# Altium PCB 电机驱动L298N带光耦.PcbDoc (part 2 of 2)
Units mm, origin at the board's own origin, x right, y up, seen from the top; angles counter-clockwise.
Board outline 152.4 x 101.6 mm, 2 copper layers (Top Layer, Bottom Layer); 36 components, 29 nets, 101 pads, 0 vias.
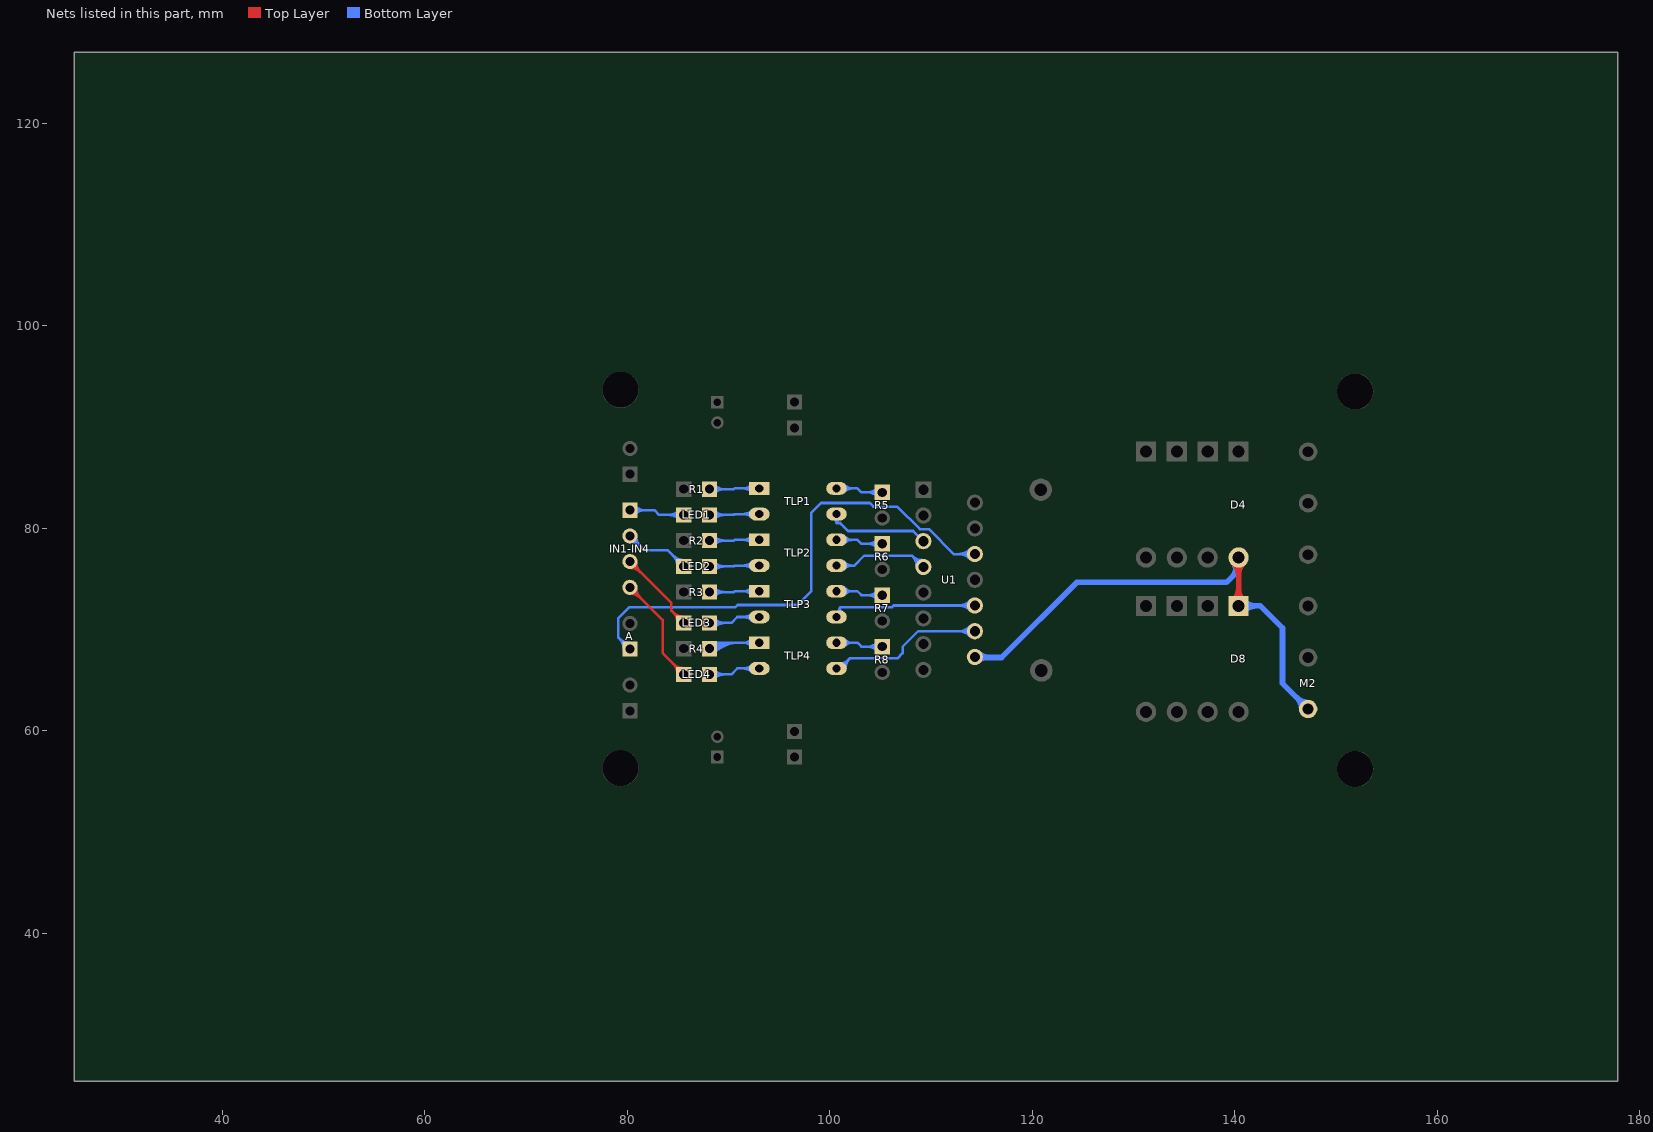
[diagram p2: the nets of this part, all layers, seen from the top]

## Nets (pads, with @x,y where several pads share a name; then routed paths per layer and width w, separated by ;. In a path a pad name is that pad's centre, name@x,y a point inside that pad or via, vN(x,y) a via of type N, cw(c..) or ccw(c..) an arc to the next point about the centre after c; other vN are vias at no path point) (continued)
NetD4_1: D4.1 D8.2 M2.2 U1.14 | length 67.2
  Top Layer w0.554: D8.2@139.852,72.844 ccw(c138.618,74.078) 140.363,74.078 ccw(c142.108,74.078) D8.2@140.874,72.844 ; D4.1@139.852,76.602 cw(c138.618,75.367) 140.363,75.367 cw(c142.108,75.367) D4.1@140.874,76.602 ; D8.2@140.363,72.333 D4.1@140.363,77.113
  Bottom Layer w0.554: U1.14@114.162,67.47 114.39,67.241 116.959,67.241 124.38,74.662 139.164,74.662 140.363,75.861 ; U1.14@114.691,66.924 cw(c115.458,66.157) 115.458,67.241 ; U1.14@114.691,67.663 ccw(c115.709,68.682) 115.709,67.241 ; 139.789,75.288 ccw(c139.1,75.978) D4.1@139.825,76.63 ; D4.1@140.002,76.487 cw(c139.641,75.861) 140.363,75.861 ; 140.203,75.701 ccw(c139.535,76.369) D4.1@140.237,77 ; D8.2@140.363,72.333 142.52,72.333 144.7,70.153 144.7,64.685 M2.2@147.23,62.155 ; D4.1@140.363,77.113 140.363,75.861 ; D4.1@140.724,76.487 ccw(c141.085,75.861) 140.363,75.861 ; D8.2@140.874,71.822 cw(c142.108,70.587) 142.108,72.333 cw(c142.108,74.078) D8.2@140.874,72.844 ; M2.2@146.595,62.155 ccw(c145.062,62.155) 146.146,63.239 ccw(c147.23,64.324) M2.2@147.23,62.79
NetIN1-IN4_1: IN1-IN4.1 LED1.2 | length 35.6
  Bottom Layer w0.254: IN1-IN4.1@80.264,81.788 82.677,81.788 83.145,81.32 LED1.2@85.583,81.32 ; IN1-IN4.1@80.525,81.527 cw(c81.155,80.897) 81.155,81.788 ; IN1-IN4.1@80.525,81.527 cw(c81.155,80.897) 81.155,81.788 ; IN1-IN4.1@80.525,81.527 cw(c81.155,80.897) 81.155,81.788 ; IN1-IN4.1@80.525,81.527 cw(c81.155,80.897) 81.155,81.788 ; IN1-IN4.1@80.525,82.049 ccw(c81.155,82.679) 81.155,81.788 ; IN1-IN4.1@80.525,82.049 ccw(c81.155,82.679) 81.155,81.788 ; IN1-IN4.1@80.525,82.049 ccw(c81.155,82.679) 81.155,81.788 ; IN1-IN4.1@80.525,82.049 ccw(c81.155,82.679) 81.155,81.788 ; IN1-IN4.1@80.705,81.347 cw(c81.768,80.284) 81.768,81.788 ; IN1-IN4.1@80.705,81.347 cw(c81.768,80.284) 81.768,81.788 ; IN1-IN4.1@80.705,81.347 cw(c81.768,80.284) 81.768,81.788 ; IN1-IN4.1@80.705,81.347 cw(c81.768,80.284) 81.768,81.788 ; IN1-IN4.1@80.705,82.229 ccw(c81.768,83.292) 81.768,81.788 ; IN1-IN4.1@80.705,82.229 ccw(c81.768,83.292) 81.768,81.788 ; IN1-IN4.1@80.705,82.229 ccw(c81.768,83.292) 81.768,81.788 ; IN1-IN4.1@80.705,82.229 ccw(c81.768,83.292) 81.768,81.788 ; 84.079,81.32 cw(c84.079,79.816) LED1.2@85.142,80.879 ; 84.078,81.32 ccw(c84.078,82.824) LED1.2@85.142,81.76 ; 84.079,81.32 cw(c84.079,79.816) LED1.2@85.142,80.879 ; 84.079,81.32 ccw(c84.079,82.824) LED1.2@85.142,81.76 ; 84.079,81.32 cw(c84.079,79.816) LED1.2@85.142,80.879 ; 84.079,81.32 ccw(c84.079,82.824) LED1.2@85.142,81.76 ; 84.079,81.32 cw(c84.079,79.816) LED1.2@85.142,80.879 ; 84.079,81.32 ccw(c84.079,82.824) LED1.2@85.142,81.76 ; 84.692,81.32 cw(c84.692,80.429) LED1.2@85.322,81.059 ; 84.692,81.32 ccw(c84.692,82.211) LED1.2@85.322,81.581 ; 84.692,81.32 cw(c84.692,80.429) LED1.2@85.322,81.059 ; 84.692,81.32 ccw(c84.692,82.211) LED1.2@85.322,81.581 ; 84.692,81.32 cw(c84.692,80.429) LED1.2@85.322,81.059 ; 84.692,81.32 ccw(c84.692,82.211) LED1.2@85.322,81.581 ; 84.692,81.32 cw(c84.692,80.429) LED1.2@85.322,81.059 ; 84.692,81.32 ccw(c84.692,82.211) LED1.2@85.322,81.581
NetIN1-IN4_2: IN1-IN4.2 LED2.2 | length 36.7
  Bottom Layer w0.254: IN1-IN4.2@80.264,79.248 81.661,77.851 83.971,77.851 LED2.2@85.583,76.24 ; IN1-IN4.2@80.264,78.625 cw(c80.264,77.121) 81.328,78.184 ; IN1-IN4.2@80.264,78.625 cw(c80.264,77.121) 81.328,78.184 ; IN1-IN4.2@80.264,78.625 cw(c80.264,77.121) 81.328,78.184 ; IN1-IN4.2@80.264,78.625 cw(c80.264,77.121) 81.328,78.184 ; IN1-IN4.2@80.264,78.879 cw(c80.264,77.988) 80.894,78.618 ; IN1-IN4.2@80.264,78.879 cw(c80.264,77.988) 80.894,78.618 ; IN1-IN4.2@80.264,78.879 cw(c80.264,77.988) 80.894,78.618 ; IN1-IN4.2@80.264,78.879 cw(c80.264,77.988) 80.894,78.618 ; IN1-IN4.2@80.633,79.248 ccw(c81.524,79.248) 80.894,78.618 ; IN1-IN4.2@80.633,79.248 ccw(c81.524,79.248) 80.894,78.618 ; IN1-IN4.2@80.633,79.248 ccw(c81.524,79.248) 80.894,78.618 ; IN1-IN4.2@80.633,79.248 ccw(c81.524,79.248) 80.894,78.618 ; IN1-IN4.2@80.887,79.248 ccw(c82.391,79.248) 81.328,78.184 ; IN1-IN4.2@80.887,79.248 ccw(c82.391,79.248) 81.328,78.184 ; IN1-IN4.2@80.887,79.248 ccw(c82.391,79.248) 81.328,78.184 ; IN1-IN4.2@80.887,79.248 ccw(c82.391,79.248) 81.328,78.184 ; 84.519,77.303 cw(c83.456,76.24) LED2.2@84.96,76.24 ; 84.519,77.303 ccw(c85.583,78.367) LED2.2@85.583,76.863 ; 84.519,77.303 cw(c83.456,76.24) LED2.2@84.96,76.24 ; 84.519,77.303 ccw(c85.583,78.367) LED2.2@85.583,76.863 ; 84.519,77.303 cw(c83.456,76.24) LED2.2@84.96,76.24 ; 84.519,77.303 ccw(c85.583,78.367) LED2.2@85.583,76.863 ; 84.519,77.303 cw(c83.456,76.24) LED2.2@84.96,76.24 ; 84.519,77.303 ccw(c85.583,78.367) LED2.2@85.583,76.863 ; LED2.2@84.953,76.87 cw(c84.323,76.24) LED2.2@85.214,76.24 ; LED2.2@84.953,76.87 ccw(c85.583,77.5) LED2.2@85.583,76.609 ; LED2.2@84.953,76.87 cw(c84.323,76.24) LED2.2@85.214,76.24 ; LED2.2@84.953,76.87 ccw(c85.583,77.5) LED2.2@85.583,76.609 ; LED2.2@84.953,76.87 cw(c84.323,76.24) LED2.2@85.214,76.24 ; LED2.2@84.953,76.87 ccw(c85.583,77.5) LED2.2@85.583,76.609 ; LED2.2@84.953,76.87 cw(c84.323,76.24) LED2.2@85.214,76.24 ; LED2.2@84.953,76.87 ccw(c85.583,77.5) LED2.2@85.583,76.609
NetIN1-IN4_3: IN1-IN4.3 LED3.2 | length 38.4
  Top Layer w0.254: IN1-IN4.3@80.264,76.708 84.353,72.619 84.353,71.881 LED3.2@85.583,70.652 ; IN1-IN4.3@80.264,76.085 cw(c80.264,74.581) 81.328,75.644 ; IN1-IN4.3@80.264,76.085 cw(c80.264,74.581) 81.328,75.644 ; IN1-IN4.3@80.264,76.085 cw(c80.264,74.581) 81.328,75.644 ; IN1-IN4.3@80.264,76.085 cw(c80.264,74.581) 81.328,75.644 ; IN1-IN4.3@80.264,76.339 cw(c80.264,75.448) 80.894,76.078 ; IN1-IN4.3@80.264,76.339 cw(c80.264,75.448) 80.894,76.078 ; IN1-IN4.3@80.264,76.339 cw(c80.264,75.448) 80.894,76.078 ; IN1-IN4.3@80.264,76.339 cw(c80.264,75.448) 80.894,76.078 ; IN1-IN4.3@80.633,76.708 ccw(c81.524,76.708) 80.894,76.078 ; IN1-IN4.3@80.633,76.708 ccw(c81.524,76.708) 80.894,76.078 ; IN1-IN4.3@80.633,76.708 ccw(c81.524,76.708) 80.894,76.078 ; IN1-IN4.3@80.633,76.708 ccw(c81.524,76.708) 80.894,76.078 ; IN1-IN4.3@80.887,76.708 ccw(c82.391,76.708) 81.328,75.644 ; IN1-IN4.3@80.887,76.708 ccw(c82.391,76.708) 81.328,75.644 ; IN1-IN4.3@80.887,76.708 ccw(c82.391,76.708) 81.328,75.644 ; IN1-IN4.3@80.887,76.708 ccw(c82.391,76.708) 81.328,75.644 ; 84.519,71.715 cw(c83.456,70.652) LED3.2@84.96,70.652 ; 84.519,71.715 ccw(c85.583,72.779) LED3.2@85.583,71.275 ; 84.519,71.715 cw(c83.456,70.652) LED3.2@84.96,70.652 ; 84.519,71.715 ccw(c85.583,72.779) LED3.2@85.583,71.275 ; 84.519,71.715 cw(c83.456,70.652) LED3.2@84.96,70.652 ; 84.519,71.715 ccw(c85.583,72.779) LED3.2@85.583,71.275 ; 84.519,71.715 cw(c83.456,70.652) LED3.2@84.96,70.652 ; 84.519,71.715 ccw(c85.583,72.779) LED3.2@85.583,71.275 ; LED3.2@84.953,71.282 cw(c84.323,70.652) LED3.2@85.214,70.652 ; LED3.2@84.953,71.282 ccw(c85.583,71.912) LED3.2@85.583,71.021 ; LED3.2@84.953,71.282 cw(c84.323,70.652) LED3.2@85.214,70.652 ; LED3.2@84.953,71.282 ccw(c85.583,71.912) LED3.2@85.583,71.021 ; LED3.2@84.953,71.282 cw(c84.323,70.652) LED3.2@85.214,70.652 ; LED3.2@84.953,71.282 ccw(c85.583,71.912) LED3.2@85.583,71.021 ; LED3.2@84.953,71.282 cw(c84.323,70.652) LED3.2@85.214,70.652 ; LED3.2@84.953,71.282 ccw(c85.583,71.912) LED3.2@85.583,71.021
NetIN1-IN4_4: IN1-IN4.4 LED4.2 | length 40.9
  Top Layer w0.254: IN1-IN4.4@80.264,74.168 83.49,70.942 83.49,67.665 LED4.2@85.583,65.572 ; IN1-IN4.4@80.264,73.545 cw(c80.264,72.041) 81.328,73.104 ; IN1-IN4.4@80.264,73.545 cw(c80.264,72.041) 81.328,73.104 ; IN1-IN4.4@80.264,73.545 cw(c80.264,72.041) 81.328,73.104 ; IN1-IN4.4@80.264,73.545 cw(c80.264,72.041) 81.328,73.104 ; IN1-IN4.4@80.264,73.799 cw(c80.264,72.908) 80.894,73.538 ; IN1-IN4.4@80.264,73.799 cw(c80.264,72.908) 80.894,73.538 ; IN1-IN4.4@80.264,73.799 cw(c80.264,72.908) 80.894,73.538 ; IN1-IN4.4@80.264,73.799 cw(c80.264,72.908) 80.894,73.538 ; IN1-IN4.4@80.633,74.168 ccw(c81.524,74.168) 80.894,73.538 ; IN1-IN4.4@80.633,74.168 ccw(c81.524,74.168) 80.894,73.538 ; IN1-IN4.4@80.633,74.168 ccw(c81.524,74.168) 80.894,73.538 ; IN1-IN4.4@80.633,74.168 ccw(c81.524,74.168) 80.894,73.538 ; IN1-IN4.4@80.887,74.168 ccw(c82.391,74.168) 81.328,73.104 ; IN1-IN4.4@80.887,74.168 ccw(c82.391,74.168) 81.328,73.104 ; IN1-IN4.4@80.887,74.168 ccw(c82.391,74.168) 81.328,73.104 ; IN1-IN4.4@80.887,74.168 ccw(c82.391,74.168) 81.328,73.104 ; 84.519,66.635 cw(c83.456,65.572) LED4.2@84.96,65.572 ; 84.519,66.635 ccw(c85.583,67.699) LED4.2@85.583,66.195 ; 84.519,66.635 cw(c83.456,65.572) LED4.2@84.96,65.572 ; 84.519,66.635 ccw(c85.583,67.699) LED4.2@85.583,66.195 ; 84.519,66.635 cw(c83.456,65.572) LED4.2@84.96,65.572 ; 84.519,66.635 ccw(c85.583,67.699) LED4.2@85.583,66.195 ; 84.519,66.635 cw(c83.456,65.572) LED4.2@84.96,65.572 ; 84.519,66.635 ccw(c85.583,67.699) LED4.2@85.583,66.195 ; LED4.2@84.953,66.202 cw(c84.323,65.572) LED4.2@85.214,65.572 ; LED4.2@84.953,66.202 ccw(c85.583,66.832) LED4.2@85.583,65.941 ; LED4.2@84.953,66.202 cw(c84.323,65.572) LED4.2@85.214,65.572 ; LED4.2@84.953,66.202 ccw(c85.583,66.832) LED4.2@85.583,65.941 ; LED4.2@84.953,66.202 cw(c84.323,65.572) LED4.2@85.214,65.572 ; LED4.2@84.953,66.202 ccw(c85.583,66.832) LED4.2@85.583,65.941 ; LED4.2@84.953,66.202 cw(c84.323,65.572) LED4.2@85.214,65.572 ; LED4.2@84.953,66.202 ccw(c85.583,66.832) LED4.2@85.583,65.941
NetLED1_1: LED1.1 TLP1.2 | length 27.7
  Bottom Layer w0.254: LED1.1@88.123,81.32 90.526,81.32 90.607,81.401 TLP1.2@93.041,81.401 ; LED1.1@88.384,81.059 cw(c89.013,80.429) 89.013,81.32 ; LED1.1@88.384,81.059 cw(c89.013,80.429) 89.013,81.32 ; LED1.1@88.384,81.059 cw(c89.013,80.429) 89.013,81.32 ; LED1.1@88.384,81.059 cw(c89.013,80.429) 89.013,81.32 ; LED1.1@88.384,81.581 ccw(c89.013,82.211) 89.013,81.32 ; LED1.1@88.384,81.581 ccw(c89.013,82.211) 89.013,81.32 ; LED1.1@88.384,81.581 ccw(c89.013,82.211) 89.013,81.32 ; LED1.1@88.384,81.581 ccw(c89.013,82.211) 89.013,81.32 ; LED1.1@88.563,80.879 cw(c89.627,79.816) 89.627,81.32 ; LED1.1@88.563,80.879 cw(c89.627,79.816) 89.627,81.32 ; LED1.1@88.563,80.879 cw(c89.627,79.816) 89.627,81.32 ; LED1.1@88.563,80.879 cw(c89.627,79.816) 89.627,81.32 ; LED1.1@88.563,81.76 ccw(c89.627,82.824) 89.627,81.32 ; LED1.1@88.563,81.76 ccw(c89.627,82.824) 89.627,81.32 ; LED1.1@88.563,81.76 ccw(c89.627,82.824) 89.627,81.32 ; LED1.1@88.563,81.76 ccw(c89.627,82.824) 89.627,81.32 ; 91.434,81.401 cw(c91.434,80.174) TLP1.2@92.301,81.042 ; 91.434,81.401 ccw(c91.434,82.627) TLP1.2@92.301,81.76 ; 91.434,81.401 cw(c91.434,80.174) TLP1.2@92.301,81.042 ; 91.434,81.401 ccw(c91.434,82.627) TLP1.2@92.301,81.76 ; 91.434,81.401 cw(c91.434,80.174) TLP1.2@92.301,81.042 ; 91.434,81.401 ccw(c91.434,82.627) TLP1.2@92.301,81.76 ; 91.434,81.401 cw(c91.434,80.174) TLP1.2@92.301,81.042 ; 91.434,81.401 ccw(c91.434,82.627) TLP1.2@92.301,81.76
NetLED2_1: LED2.1 TLP2.2 | length 27.7
  Bottom Layer w0.254: LED2.1@88.123,76.24 90.526,76.24 90.607,76.321 TLP2.2@93.041,76.321 ; LED2.1@88.384,75.979 cw(c89.013,75.349) 89.013,76.24 ; LED2.1@88.384,75.979 cw(c89.013,75.349) 89.013,76.24 ; LED2.1@88.384,75.979 cw(c89.013,75.349) 89.013,76.24 ; LED2.1@88.384,75.979 cw(c89.013,75.349) 89.013,76.24 ; LED2.1@88.384,76.501 ccw(c89.013,77.131) 89.013,76.24 ; LED2.1@88.384,76.501 ccw(c89.013,77.131) 89.013,76.24 ; LED2.1@88.384,76.501 ccw(c89.013,77.131) 89.013,76.24 ; LED2.1@88.384,76.501 ccw(c89.013,77.131) 89.013,76.24 ; LED2.1@88.563,75.799 cw(c89.627,74.736) 89.627,76.24 ; LED2.1@88.563,75.799 cw(c89.627,74.736) 89.627,76.24 ; LED2.1@88.563,75.799 cw(c89.627,74.736) 89.627,76.24 ; LED2.1@88.563,75.799 cw(c89.627,74.736) 89.627,76.24 ; LED2.1@88.563,76.68 ccw(c89.627,77.744) 89.627,76.24 ; LED2.1@88.563,76.68 ccw(c89.627,77.744) 89.627,76.24 ; LED2.1@88.563,76.68 ccw(c89.627,77.744) 89.627,76.24 ; LED2.1@88.563,76.68 ccw(c89.627,77.744) 89.627,76.24 ; 91.434,76.321 cw(c91.434,75.094) TLP2.2@92.301,75.962 ; 91.434,76.321 ccw(c91.434,77.547) TLP2.2@92.301,76.68 ; 91.434,76.321 cw(c91.434,75.094) TLP2.2@92.301,75.962 ; 91.434,76.321 ccw(c91.434,77.547) TLP2.2@92.301,76.68 ; 91.434,76.321 cw(c91.434,75.094) TLP2.2@92.301,75.962 ; 91.434,76.321 ccw(c91.434,77.547) TLP2.2@92.301,76.68 ; 91.434,76.321 cw(c91.434,75.094) TLP2.2@92.301,75.962 ; 91.434,76.321 ccw(c91.434,77.547) TLP2.2@92.301,76.68
NetLED3_1: LED3.1 TLP3.2 | length 27.9
  Bottom Layer w0.254: LED3.1@88.123,70.652 90.272,70.652 90.861,71.241 TLP3.2@93.041,71.241 ; LED3.1@88.384,70.391 cw(c89.013,69.761) 89.013,70.652 ; LED3.1@88.384,70.391 cw(c89.013,69.761) 89.013,70.652 ; LED3.1@88.384,70.391 cw(c89.013,69.761) 89.013,70.652 ; LED3.1@88.384,70.391 cw(c89.013,69.761) 89.013,70.652 ; LED3.1@88.384,70.913 ccw(c89.013,71.543) 89.013,70.652 ; LED3.1@88.384,70.913 ccw(c89.013,71.543) 89.013,70.652 ; LED3.1@88.384,70.913 ccw(c89.013,71.543) 89.013,70.652 ; LED3.1@88.384,70.913 ccw(c89.013,71.543) 89.013,70.652 ; LED3.1@88.563,70.211 cw(c89.627,69.148) 89.627,70.652 ; LED3.1@88.563,70.211 cw(c89.627,69.148) 89.627,70.652 ; LED3.1@88.563,70.211 cw(c89.627,69.148) 89.627,70.652 ; LED3.1@88.563,70.211 cw(c89.627,69.148) 89.627,70.652 ; LED3.1@88.563,71.092 ccw(c89.627,72.156) 89.627,70.652 ; LED3.1@88.563,71.092 ccw(c89.627,72.156) 89.627,70.652 ; LED3.1@88.563,71.092 ccw(c89.627,72.156) 89.627,70.652 ; LED3.1@88.563,71.092 ccw(c89.627,72.156) 89.627,70.652 ; 91.434,71.241 cw(c91.434,70.014) TLP3.2@92.301,70.882 ; 91.434,71.241 ccw(c91.434,72.467) TLP3.2@92.301,71.6 ; 91.434,71.241 cw(c91.434,70.014) TLP3.2@92.301,70.882 ; 91.434,71.241 ccw(c91.434,72.467) TLP3.2@92.301,71.6 ; 91.434,71.241 cw(c91.434,70.014) TLP3.2@92.301,70.882 ; 91.434,71.241 ccw(c91.434,72.467) TLP3.2@92.301,71.6 ; 91.434,71.241 cw(c91.434,70.014) TLP3.2@92.301,70.882 ; 91.434,71.241 ccw(c91.434,72.467) TLP3.2@92.301,71.6
NetLED4_1: LED4.1 TLP4.2 | length 27.9
  Bottom Layer w0.254: LED4.1@88.123,65.572 90.272,65.572 90.861,66.161 TLP4.2@93.041,66.161 ; LED4.1@88.384,65.311 cw(c89.013,64.681) 89.013,65.572 ; LED4.1@88.384,65.311 cw(c89.013,64.681) 89.013,65.572 ; LED4.1@88.384,65.311 cw(c89.013,64.681) 89.013,65.572 ; LED4.1@88.384,65.311 cw(c89.013,64.681) 89.013,65.572 ; LED4.1@88.384,65.833 ccw(c89.013,66.463) 89.013,65.572 ; LED4.1@88.384,65.833 ccw(c89.013,66.463) 89.013,65.572 ; LED4.1@88.384,65.833 ccw(c89.013,66.463) 89.013,65.572 ; LED4.1@88.384,65.833 ccw(c89.013,66.463) 89.013,65.572 ; LED4.1@88.563,65.131 cw(c89.627,64.068) 89.627,65.572 ; LED4.1@88.563,65.131 cw(c89.627,64.068) 89.627,65.572 ; LED4.1@88.563,65.131 cw(c89.627,64.068) 89.627,65.572 ; LED4.1@88.563,65.131 cw(c89.627,64.068) 89.627,65.572 ; LED4.1@88.563,66.012 ccw(c89.627,67.076) 89.627,65.572 ; LED4.1@88.563,66.012 ccw(c89.627,67.076) 89.627,65.572 ; LED4.1@88.563,66.012 ccw(c89.627,67.076) 89.627,65.572 ; LED4.1@88.563,66.012 ccw(c89.627,67.076) 89.627,65.572 ; 91.434,66.161 cw(c91.434,64.934) TLP4.2@92.301,65.802 ; 91.434,66.161 ccw(c91.434,67.387) TLP4.2@92.301,66.52 ; 91.434,66.161 cw(c91.434,64.934) TLP4.2@92.301,65.802 ; 91.434,66.161 ccw(c91.434,67.387) TLP4.2@92.301,66.52 ; 91.434,66.161 cw(c91.434,64.934) TLP4.2@92.301,65.802 ; 91.434,66.161 ccw(c91.434,67.387) TLP4.2@92.301,66.52 ; 91.434,66.161 cw(c91.434,64.934) TLP4.2@92.301,65.802 ; 91.434,66.161 ccw(c91.434,67.387) TLP4.2@92.301,66.52
NetPWM_1: A.1 U1.6 | length 81.7
  Bottom Layer w0.254: A.1@80.264,68.072 79.121,69.215 79.121,71.12 80.188,72.187 90.666,72.187 90.903,72.424 96.814,72.424 98.178,73.788 98.178,81.536 99.141,82.499 103.962,82.499 104.318,82.144 106.655,82.144 108.89,79.908 109.779,79.908 112.234,77.454 U1.6@114.321,77.454 ; 79.2,69.136 cw(c78.137,68.072) A.1@79.641,68.072 ; 79.2,69.136 ccw(c80.264,70.199) A.1@80.264,68.695 ; 79.2,69.136 cw(c78.137,68.072) A.1@79.641,68.072 ; 79.2,69.136 ccw(c80.264,70.199) A.1@80.264,68.695 ; 79.2,69.136 cw(c78.137,68.072) A.1@79.641,68.072 ; 79.2,69.136 ccw(c80.264,70.199) A.1@80.264,68.695 ; 79.2,69.136 cw(c78.137,68.072) A.1@79.641,68.072 ; 79.2,69.136 ccw(c80.264,70.199) A.1@80.264,68.695 ; A.1@79.634,68.702 cw(c79.004,68.072) A.1@79.895,68.072 ; A.1@79.634,68.702 ccw(c80.264,69.332) A.1@80.264,68.441 ; A.1@79.634,68.702 cw(c79.004,68.072) A.1@79.895,68.072 ; A.1@79.634,68.702 ccw(c80.264,69.332) A.1@80.264,68.441 ; A.1@79.634,68.702 cw(c79.004,68.072) A.1@79.895,68.072 ; A.1@79.634,68.702 ccw(c80.264,69.332) A.1@80.264,68.441 ; A.1@79.634,68.702 cw(c79.004,68.072) A.1@79.895,68.072 ; A.1@79.634,68.702 ccw(c80.264,69.332) A.1@80.264,68.441 ; 112.696,77.454 cw(c112.696,75.829) U1.6@113.845,76.978 ; 112.696,77.454 ccw(c112.696,79.078) U1.6@113.845,77.929 ; 112.696,77.454 cw(c112.696,75.829) U1.6@113.845,76.978 ; 112.696,77.454 ccw(c112.696,79.078) U1.6@113.845,77.929 ; 112.696,77.454 cw(c112.696,75.829) U1.6@113.845,76.978 ; 112.696,77.454 ccw(c112.696,79.078) U1.6@113.845,77.929 ; 112.696,77.454 cw(c112.696,75.829) U1.6@113.845,76.978 ; 112.696,77.454 ccw(c112.696,79.078) U1.6@113.845,77.929 ; 113.309,77.454 cw(c113.309,76.442) U1.6@114.025,77.157 ; 113.309,77.454 ccw(c113.309,78.465) U1.6@114.025,77.75 ; 113.309,77.454 cw(c113.309,76.442) U1.6@114.025,77.157 ; 113.309,77.454 ccw(c113.309,78.465) U1.6@114.025,77.75 ; 113.309,77.454 cw(c113.309,76.442) U1.6@114.025,77.157 ; 113.309,77.454 ccw(c113.309,78.465) U1.6@114.025,77.75 ; 113.309,77.454 cw(c113.309,76.442) U1.6@114.025,77.157 ; 113.309,77.454 ccw(c113.309,78.465) U1.6@114.025,77.75
NetR1_2: R1.2 TLP1.1 | length 27.7
  Bottom Layer w0.254: R1.2@88.123,83.86 90.526,83.86 90.607,83.941 TLP1.1@93.041,83.941 ; R1.2@88.384,83.599 cw(c89.013,82.969) 89.013,83.86 ; R1.2@88.384,83.599 cw(c89.013,82.969) 89.013,83.86 ; R1.2@88.384,83.599 cw(c89.013,82.969) 89.013,83.86 ; R1.2@88.384,83.599 cw(c89.013,82.969) 89.013,83.86 ; R1.2@88.384,84.121 ccw(c89.013,84.751) 89.013,83.86 ; R1.2@88.384,84.121 ccw(c89.013,84.751) 89.013,83.86 ; R1.2@88.384,84.121 ccw(c89.013,84.751) 89.013,83.86 ; R1.2@88.384,84.121 ccw(c89.013,84.751) 89.013,83.86 ; R1.2@88.563,83.419 cw(c89.627,82.356) 89.627,83.86 ; R1.2@88.563,83.419 cw(c89.627,82.356) 89.627,83.86 ; R1.2@88.563,83.419 cw(c89.627,82.356) 89.627,83.86 ; R1.2@88.563,83.419 cw(c89.627,82.356) 89.627,83.86 ; R1.2@88.563,84.3 ccw(c89.627,85.364) 89.627,83.86 ; R1.2@88.563,84.3 ccw(c89.627,85.364) 89.627,83.86 ; R1.2@88.563,84.3 ccw(c89.627,85.364) 89.627,83.86 ; R1.2@88.563,84.3 ccw(c89.627,85.364) 89.627,83.86 ; 91.434,83.941 cw(c91.434,82.714) TLP1.1@92.301,83.582 ; 91.434,83.941 ccw(c91.434,85.167) TLP1.1@92.301,84.3 ; 91.434,83.941 cw(c91.434,82.714) TLP1.1@92.301,83.582 ; 91.434,83.941 ccw(c91.434,85.167) TLP1.1@92.301,84.3 ; 91.434,83.941 cw(c91.434,82.714) TLP1.1@92.301,83.582 ; 91.434,83.941 ccw(c91.434,85.167) TLP1.1@92.301,84.3 ; 91.434,83.941 cw(c91.434,82.714) TLP1.1@92.301,83.582 ; 91.434,83.941 ccw(c91.434,85.167) TLP1.1@92.301,84.3
NetR2_2: R2.2 TLP2.1 | length 27.7
  Bottom Layer w0.254: R2.2@88.123,78.78 90.526,78.78 90.607,78.861 TLP2.1@93.041,78.861 ; R2.2@88.384,78.519 cw(c89.013,77.889) 89.013,78.78 ; R2.2@88.384,78.519 cw(c89.013,77.889) 89.013,78.78 ; R2.2@88.384,78.519 cw(c89.013,77.889) 89.013,78.78 ; R2.2@88.384,78.519 cw(c89.013,77.889) 89.013,78.78 ; R2.2@88.384,79.041 ccw(c89.013,79.671) 89.013,78.78 ; R2.2@88.384,79.041 ccw(c89.013,79.671) 89.013,78.78 ; R2.2@88.384,79.041 ccw(c89.013,79.671) 89.013,78.78 ; R2.2@88.384,79.041 ccw(c89.013,79.671) 89.013,78.78 ; R2.2@88.563,78.339 cw(c89.627,77.276) 89.627,78.78 ; R2.2@88.563,78.339 cw(c89.627,77.276) 89.627,78.78 ; R2.2@88.563,78.339 cw(c89.627,77.276) 89.627,78.78 ; R2.2@88.563,78.339 cw(c89.627,77.276) 89.627,78.78 ; R2.2@88.563,79.22 ccw(c89.627,80.284) 89.627,78.78 ; R2.2@88.563,79.22 ccw(c89.627,80.284) 89.627,78.78 ; R2.2@88.563,79.22 ccw(c89.627,80.284) 89.627,78.78 ; R2.2@88.563,79.22 ccw(c89.627,80.284) 89.627,78.78 ; 91.434,78.861 cw(c91.434,77.634) TLP2.1@92.301,78.502 ; 91.434,78.861 ccw(c91.434,80.087) TLP2.1@92.301,79.22 ; 91.434,78.861 cw(c91.434,77.634) TLP2.1@92.301,78.502 ; 91.434,78.861 ccw(c91.434,80.087) TLP2.1@92.301,79.22 ; 91.434,78.861 cw(c91.434,77.634) TLP2.1@92.301,78.502 ; 91.434,78.861 ccw(c91.434,80.087) TLP2.1@92.301,79.22 ; 91.434,78.861 cw(c91.434,77.634) TLP2.1@92.301,78.502 ; 91.434,78.861 ccw(c91.434,80.087) TLP2.1@92.301,79.22
NetR3_2: R3.2 TLP3.1 | length 27.7
  Bottom Layer w0.254: R3.2@88.123,73.7 90.526,73.7 90.607,73.781 TLP3.1@93.041,73.781 ; R3.2@88.384,73.439 cw(c89.013,72.809) 89.013,73.7 ; R3.2@88.384,73.439 cw(c89.013,72.809) 89.013,73.7 ; R3.2@88.384,73.439 cw(c89.013,72.809) 89.013,73.7 ; R3.2@88.384,73.439 cw(c89.013,72.809) 89.013,73.7 ; R3.2@88.384,73.961 ccw(c89.013,74.591) 89.013,73.7 ; R3.2@88.384,73.961 ccw(c89.013,74.591) 89.013,73.7 ; R3.2@88.384,73.961 ccw(c89.013,74.591) 89.013,73.7 ; R3.2@88.384,73.961 ccw(c89.013,74.591) 89.013,73.7 ; R3.2@88.563,73.259 cw(c89.627,72.196) 89.627,73.7 ; R3.2@88.563,73.259 cw(c89.627,72.196) 89.627,73.7 ; R3.2@88.563,73.259 cw(c89.627,72.196) 89.627,73.7 ; R3.2@88.563,73.259 cw(c89.627,72.196) 89.627,73.7 ; R3.2@88.563,74.14 ccw(c89.627,75.204) 89.627,73.7 ; R3.2@88.563,74.14 ccw(c89.627,75.204) 89.627,73.7 ; R3.2@88.563,74.14 ccw(c89.627,75.204) 89.627,73.7 ; R3.2@88.563,74.14 ccw(c89.627,75.204) 89.627,73.7 ; 91.434,73.781 cw(c91.434,72.554) TLP3.1@92.301,73.422 ; 91.434,73.781 ccw(c91.434,75.007) TLP3.1@92.301,74.14 ; 91.434,73.781 cw(c91.434,72.554) TLP3.1@92.301,73.422 ; 91.434,73.781 ccw(c91.434,75.007) TLP3.1@92.301,74.14 ; 91.434,73.781 cw(c91.434,72.554) TLP3.1@92.301,73.422 ; 91.434,73.781 ccw(c91.434,75.007) TLP3.1@92.301,74.14 ; 91.434,73.781 cw(c91.434,72.554) TLP3.1@92.301,73.422 ; 91.434,73.781 ccw(c91.434,75.007) TLP3.1@92.301,74.14
NetR4_2: R4.2 TLP4.1 | length 51.3
  Bottom Layer w0.254: R4.2@88.123,68.112 R4.2@88.712,68.701 ; TLP4.1@93.041,68.701 R4.2@88.712,68.701 ; R4.2@87.845,68.39 cw(c88.596,67.638) R4.2@88.596,68.701 ; R4.2@87.845,68.39 cw(c88.596,67.638) R4.2@88.596,68.701 ; R4.2@87.845,68.39 cw(c88.596,67.638) R4.2@88.596,68.701 ; R4.2@87.845,68.39 cw(c88.596,67.638) R4.2@88.596,68.701 ; R4.2@88.024,68.21 cw(c89.209,67.025) 89.209,68.701 ; R4.2@88.024,68.21 cw(c89.209,67.025) 89.209,68.701 ; R4.2@88.024,68.21 cw(c89.209,67.025) 89.209,68.701 ; R4.2@88.024,68.21 cw(c89.209,67.025) 89.209,68.701 ; R4.2@88.204,68.03 cw(c89.822,66.412) 89.822,68.701 ; R4.2@88.204,68.03 cw(c89.822,66.412) 89.822,68.701 ; R4.2@88.204,68.03 cw(c89.822,66.412) 89.822,68.701 ; R4.2@88.204,68.03 cw(c89.822,66.412) 89.822,68.701 ; R4.2@88.384,67.851 cw(c90.436,65.799) 90.436,68.701 ; R4.2@88.384,67.851 cw(c90.436,65.799) 90.436,68.701 ; R4.2@88.384,67.851 cw(c90.436,65.799) 90.436,68.701 ; R4.2@88.384,67.851 cw(c90.436,65.799) 90.436,68.701 ; R4.2@88.421,68.659 ccw(c88.538,68.874) R4.2@88.712,68.701 ; R4.2@88.421,68.659 ccw(c88.538,68.874) R4.2@88.712,68.701 ; R4.2@88.421,68.659 ccw(c88.538,68.874) R4.2@88.712,68.701 ; R4.2@88.421,68.659 ccw(c88.538,68.874) R4.2@88.712,68.701 ; R4.2@88.563,67.671 cw(c91.049,65.186) 91.049,68.701 ; R4.2@88.563,67.671 cw(c91.049,65.186) 91.049,68.701 ; R4.2@88.563,67.671 cw(c91.049,65.186) 91.049,68.701 ; R4.2@88.563,67.671 cw(c91.049,65.186) 91.049,68.701 ; R4.2@88.67,68.41 cw(c88.885,68.527) R4.2@88.712,68.701 ; R4.2@88.67,68.41 cw(c88.885,68.527) R4.2@88.712,68.701 ; R4.2@88.67,68.41 cw(c88.885,68.527) R4.2@88.712,68.701 ; R4.2@88.67,68.41 cw(c88.885,68.527) R4.2@88.712,68.701 ; 91.434,68.701 cw(c91.434,67.474) TLP4.1@92.301,68.342 ; 91.434,68.701 ccw(c91.434,69.927) TLP4.1@92.301,69.06 ; 91.434,68.701 cw(c91.434,67.474) TLP4.1@92.301,68.342 ; 91.434,68.701 ccw(c91.434,69.927) TLP4.1@92.301,69.06 ; 91.434,68.701 cw(c91.434,67.474) TLP4.1@92.301,68.342 ; 91.434,68.701 ccw(c91.434,69.927) TLP4.1@92.301,69.06 ; 91.434,68.701 cw(c91.434,67.474) TLP4.1@92.301,68.342 ; 91.434,68.701 ccw(c91.434,69.927) TLP4.1@92.301,69.06
NetR5_1: R5.1 TLP1.4 | length 27.4
  Bottom Layer w0.254: TLP1.4@100.661,83.941 102.718,83.941 103.109,83.55 R5.1@105.177,83.55 ; TLP1.4@101.401,83.582 cw(c102.268,82.714) 102.268,83.941 ; TLP1.4@101.401,83.582 cw(c102.268,82.714) 102.268,83.941 ; TLP1.4@101.401,83.582 cw(c102.268,82.714) 102.268,83.941 ; TLP1.4@101.401,83.582 cw(c102.268,82.714) 102.268,83.941 ; TLP1.4@101.401,84.3 ccw(c102.268,85.167) 102.268,83.941 ; TLP1.4@101.401,84.3 ccw(c102.268,85.167) 102.268,83.941 ; TLP1.4@101.401,84.3 ccw(c102.268,85.167) 102.268,83.941 ; TLP1.4@101.401,84.3 ccw(c102.268,85.167) 102.268,83.941 ; 103.673,83.55 cw(c103.673,82.046) R5.1@104.736,83.109 ; 103.673,83.55 ccw(c103.673,85.054) R5.1@104.736,83.99 ; 103.673,83.55 cw(c103.673,82.046) R5.1@104.736,83.109 ; 103.673,83.55 ccw(c103.673,85.054) R5.1@104.736,83.99 ; 103.673,83.55 cw(c103.673,82.046) R5.1@104.736,83.109 ; 103.673,83.55 ccw(c103.673,85.054) R5.1@104.736,83.99 ; 103.673,83.55 cw(c103.673,82.046) R5.1@104.736,83.109 ; 103.673,83.55 ccw(c103.673,85.054) R5.1@104.736,83.99 ; 104.286,83.55 cw(c104.286,82.659) R5.1@104.916,83.289 ; 104.286,83.55 ccw(c104.286,84.44) R5.1@104.916,83.811 ; 104.286,83.55 cw(c104.286,82.659) R5.1@104.916,83.289 ; 104.286,83.55 ccw(c104.286,84.44) R5.1@104.916,83.811 ; 104.286,83.55 cw(c104.286,82.659) R5.1@104.916,83.289 ; 104.286,83.55 ccw(c104.286,84.44) R5.1@104.916,83.811 ; 104.286,83.55 cw(c104.286,82.659) R5.1@104.916,83.289 ; 104.286,83.55 ccw(c104.286,84.44) R5.1@104.916,83.811
NetR6_1: R6.1 TLP2.4 | length 27.4
  Bottom Layer w0.254: TLP2.4@100.661,78.861 102.718,78.861 103.109,78.47 R6.1@105.177,78.47 ; TLP2.4@101.401,78.502 cw(c102.268,77.634) 102.268,78.861 ; TLP2.4@101.401,78.502 cw(c102.268,77.634) 102.268,78.861 ; TLP2.4@101.401,78.502 cw(c102.268,77.634) 102.268,78.861 ; TLP2.4@101.401,78.502 cw(c102.268,77.634) 102.268,78.861 ; TLP2.4@101.401,79.22 ccw(c102.268,80.087) 102.268,78.861 ; TLP2.4@101.401,79.22 ccw(c102.268,80.087) 102.268,78.861 ; TLP2.4@101.401,79.22 ccw(c102.268,80.087) 102.268,78.861 ; TLP2.4@101.401,79.22 ccw(c102.268,80.087) 102.268,78.861 ; 103.673,78.47 cw(c103.673,76.966) R6.1@104.736,78.029 ; 103.673,78.47 ccw(c103.673,79.974) R6.1@104.736,78.91 ; 103.673,78.47 cw(c103.673,76.966) R6.1@104.736,78.029 ; 103.673,78.47 ccw(c103.673,79.974) R6.1@104.736,78.91 ; 103.673,78.47 cw(c103.673,76.966) R6.1@104.736,78.029 ; 103.673,78.47 ccw(c103.673,79.974) R6.1@104.736,78.91 ; 103.673,78.47 cw(c103.673,76.966) R6.1@104.736,78.029 ; 103.673,78.47 ccw(c103.673,79.974) R6.1@104.736,78.91 ; 104.286,78.47 cw(c104.286,77.579) R6.1@104.916,78.209 ; 104.286,78.47 ccw(c104.286,79.36) R6.1@104.916,78.731 ; 104.286,78.47 cw(c104.286,77.579) R6.1@104.916,78.209 ; 104.286,78.47 ccw(c104.286,79.36) R6.1@104.916,78.731 ; 104.286,78.47 cw(c104.286,77.579) R6.1@104.916,78.209 ; 104.286,78.47 ccw(c104.286,79.36) R6.1@104.916,78.731 ; 104.286,78.47 cw(c104.286,77.579) R6.1@104.916,78.209 ; 104.286,78.47 ccw(c104.286,79.36) R6.1@104.916,78.731
NetR7_1: R7.1 TLP3.4 | length 27.4
  Bottom Layer w0.254: TLP3.4@100.661,73.781 102.718,73.781 103.109,73.39 R7.1@105.177,73.39 ; TLP3.4@101.401,73.422 cw(c102.268,72.554) 102.268,73.781 ; TLP3.4@101.401,73.422 cw(c102.268,72.554) 102.268,73.781 ; TLP3.4@101.401,73.422 cw(c102.268,72.554) 102.268,73.781 ; TLP3.4@101.401,73.422 cw(c102.268,72.554) 102.268,73.781 ; TLP3.4@101.401,74.14 ccw(c102.268,75.007) 102.268,73.781 ; TLP3.4@101.401,74.14 ccw(c102.268,75.007) 102.268,73.781 ; TLP3.4@101.401,74.14 ccw(c102.268,75.007) 102.268,73.781 ; TLP3.4@101.401,74.14 ccw(c102.268,75.007) 102.268,73.781 ; 103.673,73.39 cw(c103.673,71.886) R7.1@104.736,72.949 ; 103.673,73.39 ccw(c103.673,74.894) R7.1@104.736,73.83 ; 103.673,73.39 cw(c103.673,71.886) R7.1@104.736,72.949 ; 103.673,73.39 ccw(c103.673,74.894) R7.1@104.736,73.83 ; 103.673,73.39 cw(c103.673,71.886) R7.1@104.736,72.949 ; 103.673,73.39 ccw(c103.673,74.894) R7.1@104.736,73.83 ; 103.673,73.39 cw(c103.673,71.886) R7.1@104.736,72.949 ; 103.673,73.39 ccw(c103.673,74.894) R7.1@104.736,73.83 ; 104.286,73.39 cw(c104.286,72.499) R7.1@104.916,73.129 ; 104.286,73.39 ccw(c104.286,74.28) R7.1@104.916,73.651 ; 104.286,73.39 cw(c104.286,72.499) R7.1@104.916,73.129 ; 104.286,73.39 ccw(c104.286,74.28) R7.1@104.916,73.651 ; 104.286,73.39 cw(c104.286,72.499) R7.1@104.916,73.129 ; 104.286,73.39 ccw(c104.286,74.28) R7.1@104.916,73.651 ; 104.286,73.39 cw(c104.286,72.499) R7.1@104.916,73.129 ; 104.286,73.39 ccw(c104.286,74.28) R7.1@104.916,73.651
NetR8_1: R8.1 TLP4.4 | length 27.4
  Bottom Layer w0.254: TLP4.4@100.661,68.701 102.718,68.701 103.109,68.31 R8.1@105.177,68.31 ; TLP4.4@101.401,68.342 cw(c102.268,67.474) 102.268,68.701 ; TLP4.4@101.401,68.342 cw(c102.268,67.474) 102.268,68.701 ; TLP4.4@101.401,68.342 cw(c102.268,67.474) 102.268,68.701 ; TLP4.4@101.401,68.342 cw(c102.268,67.474) 102.268,68.701 ; TLP4.4@101.401,69.06 ccw(c102.268,69.927) 102.268,68.701 ; TLP4.4@101.401,69.06 ccw(c102.268,69.927) 102.268,68.701 ; TLP4.4@101.401,69.06 ccw(c102.268,69.927) 102.268,68.701 ; TLP4.4@101.401,69.06 ccw(c102.268,69.927) 102.268,68.701 ; 103.673,68.31 cw(c103.673,66.806) R8.1@104.736,67.869 ; 103.673,68.31 ccw(c103.673,69.814) R8.1@104.736,68.75 ; 103.673,68.31 cw(c103.673,66.806) R8.1@104.736,67.869 ; 103.673,68.31 ccw(c103.673,69.814) R8.1@104.736,68.75 ; 103.673,68.31 cw(c103.673,66.806) R8.1@104.736,67.869 ; 103.673,68.31 ccw(c103.673,69.814) R8.1@104.736,68.75 ; 103.673,68.31 cw(c103.673,66.806) R8.1@104.736,67.869 ; 103.673,68.31 ccw(c103.673,69.814) R8.1@104.736,68.75 ; 104.286,68.31 cw(c104.286,67.419) R8.1@104.916,68.049 ; 104.286,68.31 ccw(c104.286,69.2) R8.1@104.916,68.571 ; 104.286,68.31 cw(c104.286,67.419) R8.1@104.916,68.049 ; 104.286,68.31 ccw(c104.286,69.2) R8.1@104.916,68.571 ; 104.286,68.31 cw(c104.286,67.419) R8.1@104.916,68.049 ; 104.286,68.31 ccw(c104.286,69.2) R8.1@104.916,68.571 ; 104.286,68.31 cw(c104.286,67.419) R8.1@104.916,68.049 ; 104.286,68.31 ccw(c104.286,69.2) R8.1@104.916,68.571
NetTLP521-1_3: TLP1.3 U1.5 | length 14.5
  Bottom Layer w0.254: TLP1.3@100.661,81.401 100.66,80.518 ; U1.5@109.241,78.724 108.234,79.731 101.803,79.731 101.016,80.518 100.66,80.518 ; TLP1.3@100.405,80.962 cw(c100.146,80.518) 100.66,80.518 ; TLP1.3@100.405,80.962 cw(c100.146,80.518) 100.66,80.518 ; TLP1.3@100.405,80.962 cw(c100.146,80.518) 100.66,80.518 ; TLP1.3@100.405,80.962 cw(c100.146,80.518) 100.66,80.518 ; 100.66,80.518 cw(c101.173,80.518) TLP1.3@100.916,80.961 ; 100.66,80.518 cw(c101.173,80.518) TLP1.3@100.916,80.961 ; 100.66,80.518 cw(c101.173,80.518) TLP1.3@100.916,80.961 ; 100.66,80.518 cw(c101.173,80.518) TLP1.3@100.916,80.961
NetTLP521-2_3: TLP2.3 U1.7 | length 32.8
  Bottom Layer w0.254: TLP2.3@100.661,76.321 102.432,76.321 103.403,77.292 108.132,77.292 ; U1.7@109.241,76.184 108.132,77.292 ; TLP2.3@101.401,75.962 cw(c102.268,75.094) 102.268,76.321 ; TLP2.3@101.401,75.962 cw(c102.268,75.094) 102.268,76.321 ; TLP2.3@101.401,75.962 cw(c102.268,75.094) 102.268,76.321 ; TLP2.3@101.401,75.962 cw(c102.268,75.094) 102.268,76.321 ; TLP2.3@101.401,76.68 ccw(c102.268,77.547) 102.268,76.321 ; TLP2.3@101.401,76.68 ccw(c102.268,77.547) 102.268,76.321 ; TLP2.3@101.401,76.68 ccw(c102.268,77.547) 102.268,76.321 ; TLP2.3@101.401,76.68 ccw(c102.268,77.547) 102.268,76.321 ; 108.132,77.292 cw(c107.079,76.239) U1.7@108.568,76.201 ; 108.132,77.292 ccw(c109.185,78.345) U1.7@109.224,76.856 ; 108.132,77.292 cw(c107.079,76.239) U1.7@108.568,76.201 ; 108.132,77.292 ccw(c109.185,78.345) U1.7@109.224,76.856 ; 108.132,77.292 cw(c107.079,76.239) U1.7@108.568,76.201 ; 108.132,77.292 ccw(c109.185,78.345) U1.7@109.224,76.856 ; 108.132,77.292 cw(c107.079,76.239) U1.7@108.568,76.201 ; 108.132,77.292 ccw(c109.185,78.345) U1.7@109.224,76.856 ; 108.551,76.874 cw(c107.895,76.218) U1.7@108.822,76.194 ; 108.551,76.874 ccw(c109.206,77.529) U1.7@109.23,76.602 ; 108.551,76.874 cw(c107.895,76.218) U1.7@108.822,76.194 ; 108.551,76.874 ccw(c109.206,77.529) U1.7@109.23,76.602 ; 108.551,76.874 cw(c107.895,76.218) U1.7@108.822,76.194 ; 108.551,76.874 ccw(c109.206,77.529) U1.7@109.23,76.602 ; 108.551,76.874 cw(c107.895,76.218) U1.7@108.822,76.194 ; 108.551,76.874 ccw(c109.206,77.529) U1.7@109.23,76.602
NetTLP521-3_3: TLP3.3 U1.10 | length 35.7
  Bottom Layer w0.254: TLP3.3@100.661,71.241 100.965,71.241 100.965,72.136 ; U1.10@114.321,72.374 106.308,72.374 106.147,72.212 101.041,72.212 100.965,72.136 ; TLP3.3@100.725,71.638 ccw(c100.328,72.136) 100.965,72.136 ; TLP3.3@100.725,71.638 ccw(c100.328,72.136) 100.965,72.136 ; TLP3.3@100.725,71.638 ccw(c100.328,72.136) 100.965,72.136 ; TLP3.3@100.725,71.638 ccw(c100.328,72.136) 100.965,72.136 ; 100.965,72.136 ccw(c101.434,72.136) TLP3.3@101.246,71.706 ; 100.965,72.136 ccw(c101.434,72.136) TLP3.3@101.246,71.706 ; 100.965,72.136 ccw(c101.434,72.136) TLP3.3@101.246,71.706 ; 100.965,72.136 ccw(c101.434,72.136) TLP3.3@101.246,71.706 ; 112.696,72.374 cw(c112.696,70.749) U1.10@113.845,71.898 ; 112.696,72.374 ccw(c112.696,73.998) U1.10@113.845,72.849 ; 112.696,72.374 cw(c112.696,70.749) U1.10@113.845,71.898 ; 112.696,72.374 ccw(c112.696,73.998) U1.10@113.845,72.849 ; 112.696,72.374 cw(c112.696,70.749) U1.10@113.845,71.898 ; 112.696,72.374 ccw(c112.696,73.998) U1.10@113.845,72.849 ; 112.696,72.374 cw(c112.696,70.749) U1.10@113.845,71.898 ; 112.696,72.374 ccw(c112.696,73.998) U1.10@113.845,72.849 ; 113.309,72.374 cw(c113.309,71.362) U1.10@114.025,72.077 ; 113.309,72.374 ccw(c113.309,73.385) U1.10@114.025,72.67 ; 113.309,72.374 cw(c113.309,71.362) U1.10@114.025,72.077 ; 113.309,72.374 ccw(c113.309,73.385) U1.10@114.025,72.67 ; 113.309,72.374 cw(c113.309,71.362) U1.10@114.025,72.077 ; 113.309,72.374 ccw(c113.309,73.385) U1.10@114.025,72.67 ; 113.309,72.374 cw(c113.309,71.362) U1.10@114.025,72.077 ; 113.309,72.374 ccw(c113.309,73.385) U1.10@114.025,72.67
NetTLP521-4_3: TLP4.3 U1.12 | length 42.2
  Bottom Layer w0.254: TLP4.3@100.661,66.161 100.984,66.161 101.981,67.158 106.68,67.158 107.188,67.666 107.188,68.301 108.721,69.834 U1.12@114.321,69.834 ; TLP4.3@101.042,66.669 ccw(c101.042,67.756) 101.811,66.987 ; TLP4.3@101.042,66.669 ccw(c101.042,67.756) 101.811,66.987 ; TLP4.3@101.042,66.669 ccw(c101.042,67.756) 101.811,66.987 ; TLP4.3@101.042,66.669 ccw(c101.042,67.756) 101.811,66.987 ; TLP4.3@101.296,66.161 cw(c102.048,66.161) 101.516,66.693 ; TLP4.3@101.296,66.161 cw(c102.048,66.161) 101.516,66.693 ; TLP4.3@101.296,66.161 cw(c102.048,66.161) 101.516,66.693 ; TLP4.3@101.296,66.161 cw(c102.048,66.161) 101.516,66.693 ; TLP4.3@101.55,66.161 cw(c102.916,66.161) 101.95,67.127 ; TLP4.3@101.55,66.161 cw(c102.916,66.161) 101.95,67.127 ; TLP4.3@101.55,66.161 cw(c102.916,66.161) 101.95,67.127 ; TLP4.3@101.55,66.161 cw(c102.916,66.161) 101.95,67.127 ; 112.696,69.834 cw(c112.696,68.209) U1.12@113.845,69.358 ; 112.696,69.834 ccw(c112.696,71.458) U1.12@113.845,70.309 ; 112.696,69.834 cw(c112.696,68.209) U1.12@113.845,69.358 ; 112.696,69.834 ccw(c112.696,71.458) U1.12@113.845,70.309 ; 112.696,69.834 cw(c112.696,68.209) U1.12@113.845,69.358 ; 112.696,69.834 ccw(c112.696,71.458) U1.12@113.845,70.309 ; 112.696,69.834 cw(c112.696,68.209) U1.12@113.845,69.358 ; 112.696,69.834 ccw(c112.696,71.458) U1.12@113.845,70.309 ; 113.309,69.834 cw(c113.309,68.822) U1.12@114.025,69.537 ; 113.309,69.834 ccw(c113.309,70.845) U1.12@114.025,70.13 ; 113.309,69.834 cw(c113.309,68.822) U1.12@114.025,69.537 ; 113.309,69.834 ccw(c113.309,70.845) U1.12@114.025,70.13 ; 113.309,69.834 cw(c113.309,68.822) U1.12@114.025,69.537 ; 113.309,69.834 ccw(c113.309,70.845) U1.12@114.025,70.13 ; 113.309,69.834 cw(c113.309,68.822) U1.12@114.025,69.537 ; 113.309,69.834 ccw(c113.309,70.845) U1.12@114.025,70.13

## Polygon pours and split planes (outlines as drawn)
no net on Top Layer (hatched 45Degree grid 0.508 track 0.203): 76.305,96.125 154.956,96.125 154.956,53.396 76.305,53.396
no net on Bottom Layer (hatched 45Degree grid 0.508 track 0.203): 76.211,95.716 154.844,95.716 154.844,52.951 76.211,52.951

## Silkscreen, mask and mechanical layers (free items; w line width, h text height)
Top Overlay:
  drawing of 1517 lines, arcs and shapes, not listed
  text "SN:115451619" at 132.272,92.006 h1.52
  text "http://www.ourhc.cn" at 101.093,89.028 h1.76
  text "GND" at 77.117,86.57 h1.12 r270
  text "GND" at 154.176,85.907 h1.52 r90
  text "5V" at 77.223,71.658 h1.12 r270
  text "B" at 77.356,62.258 h1.12 r270
Mechanical 1:
  lines w0.854: 75.501,97.259 75.555,52.655 ; 75.773,52.6 155.911,52.588 ; 75.773,97.259 155.951,97.259 ; 156.06,52.491 156.06,96.942

## Text inside footprints (layer, text, board x,y; h text height)
C1: Top Overlay "+" at 88.15,95.415 h1.5 r270
C3: Top Overlay "+" at 88.15,54.445 h1.5 r270
U1: Top Overlay "1" at 108.703,86.293 h1.5 r270; Top Overlay "15" at 108.532,64.83 h1.5 r270